# Altium PCB PCB1.PcbDoc
Units mm, origin at the board's own origin, x right, y up, seen from the top; angles counter-clockwise.
Board outline 63 x 73 mm, 2 copper layers (Top Layer, Bottom Layer); 9 components, 23 nets, 80 pads, 5 vias.
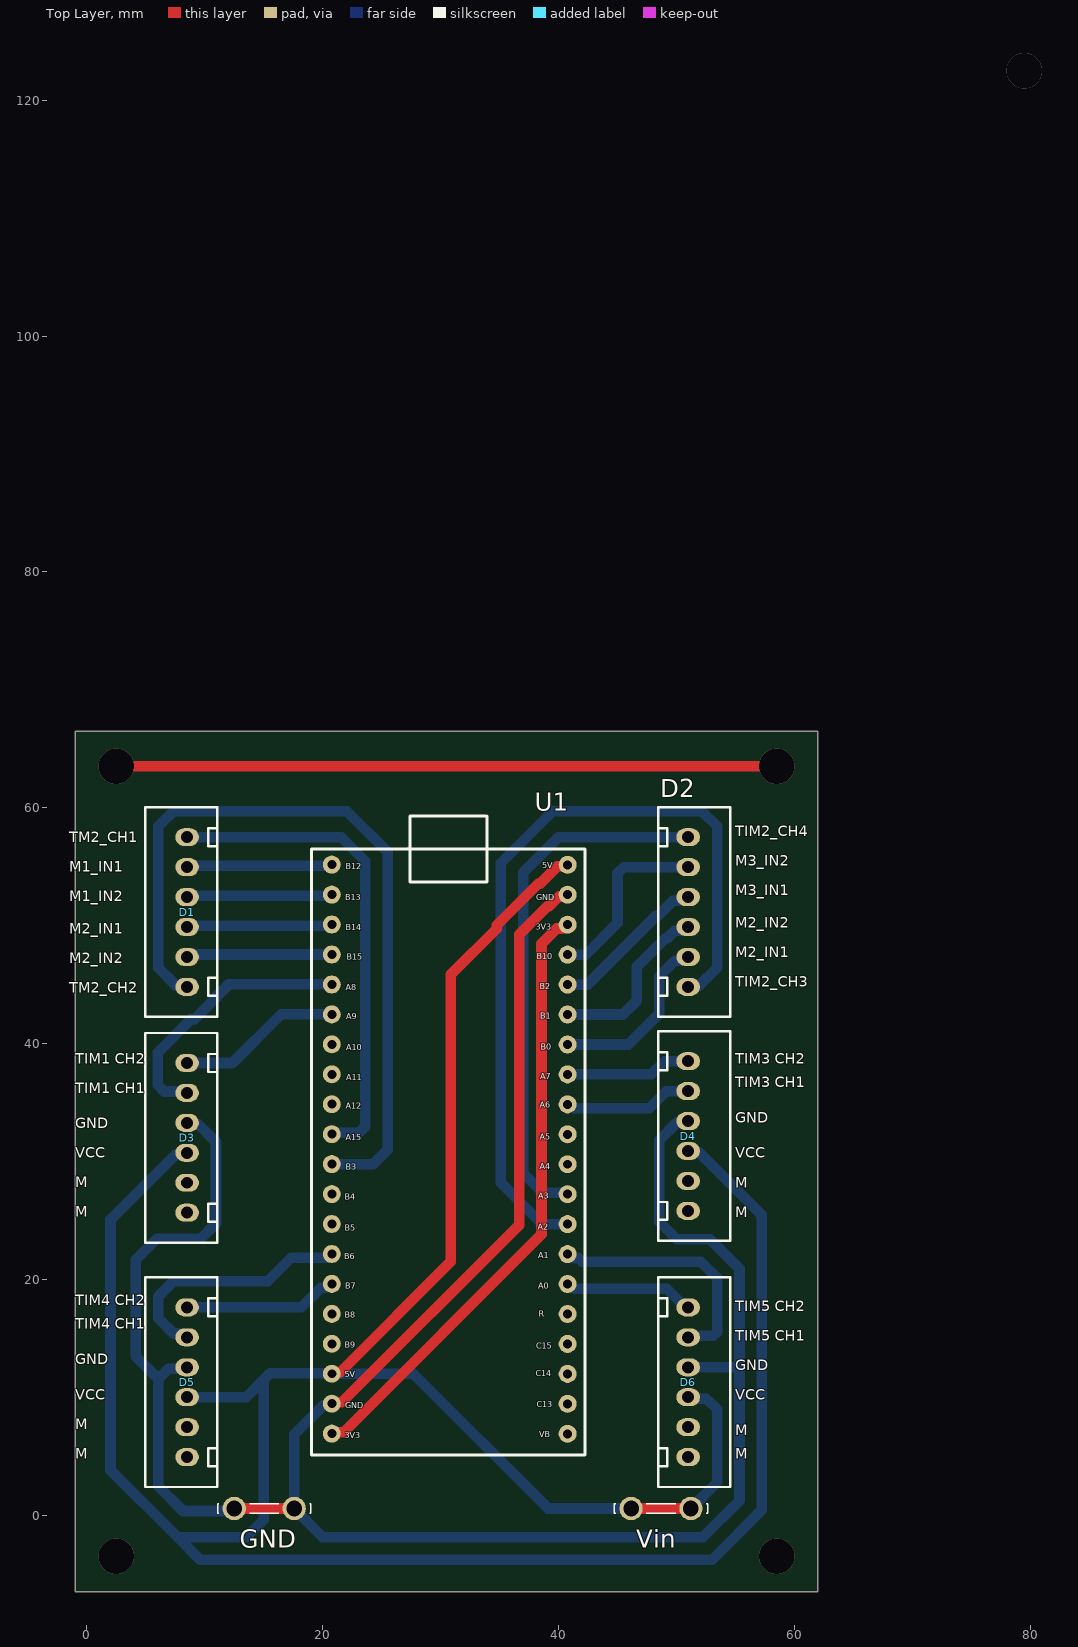
[diagram p0: Top Layer view]
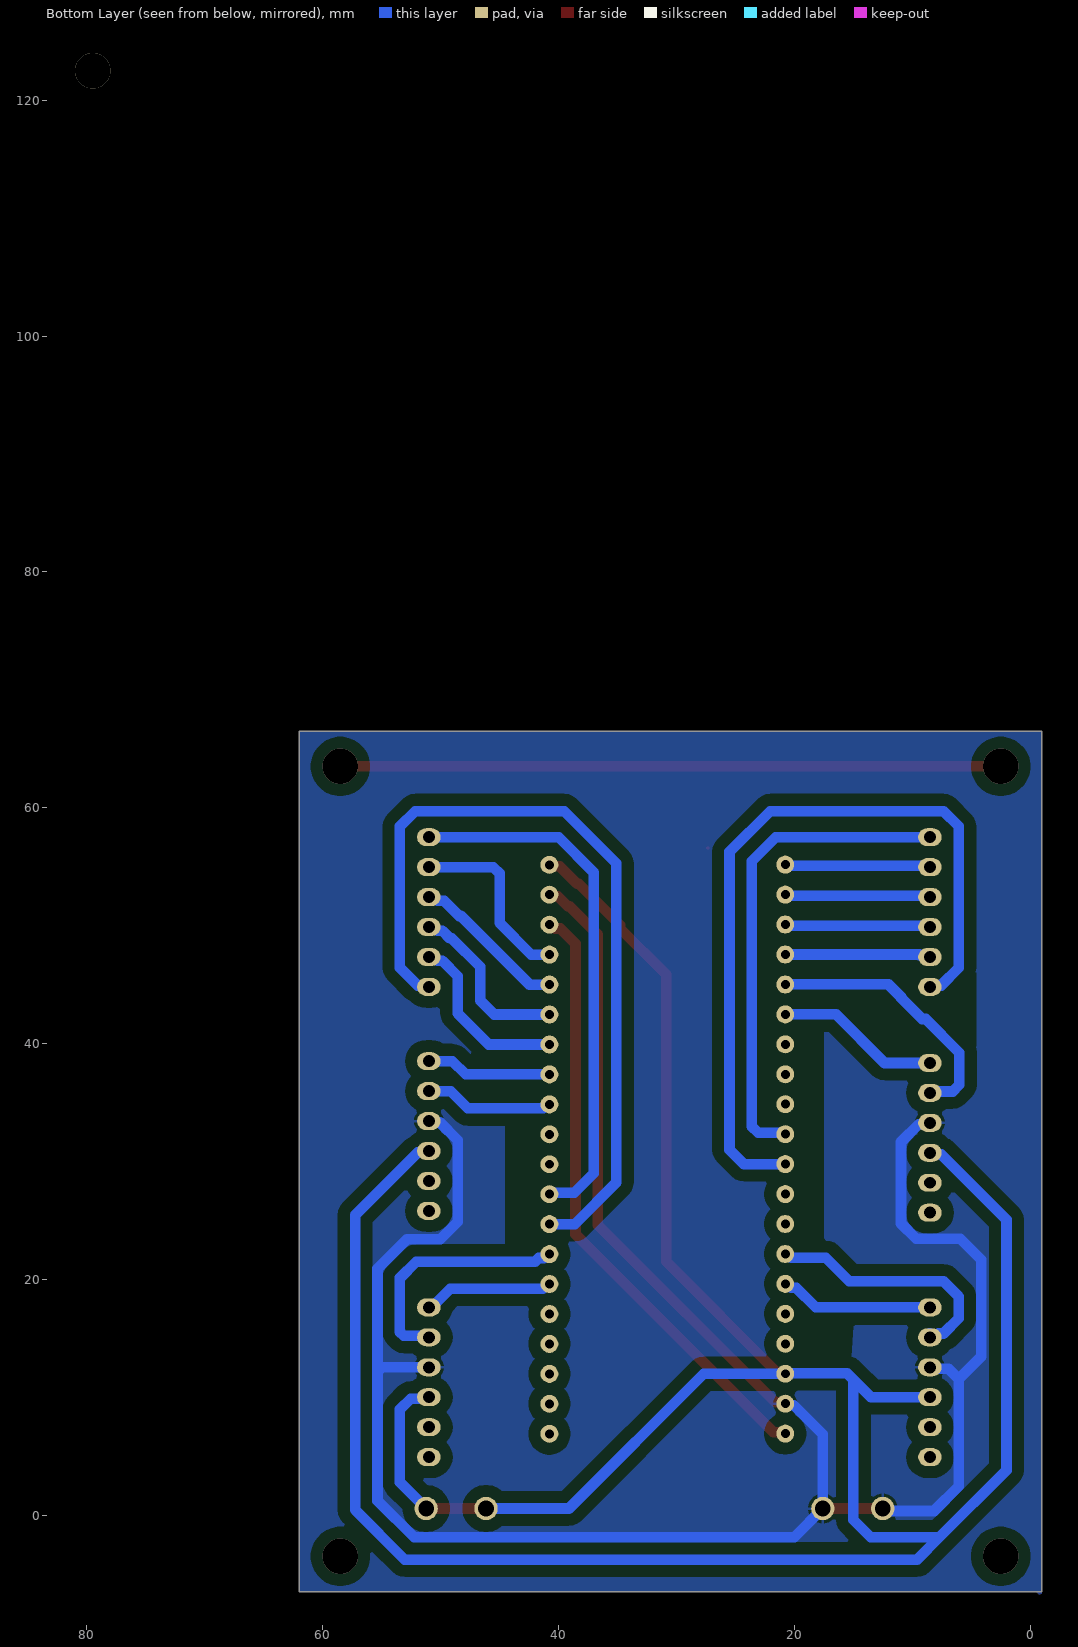
[diagram p1: Bottom Layer view, seen from below]
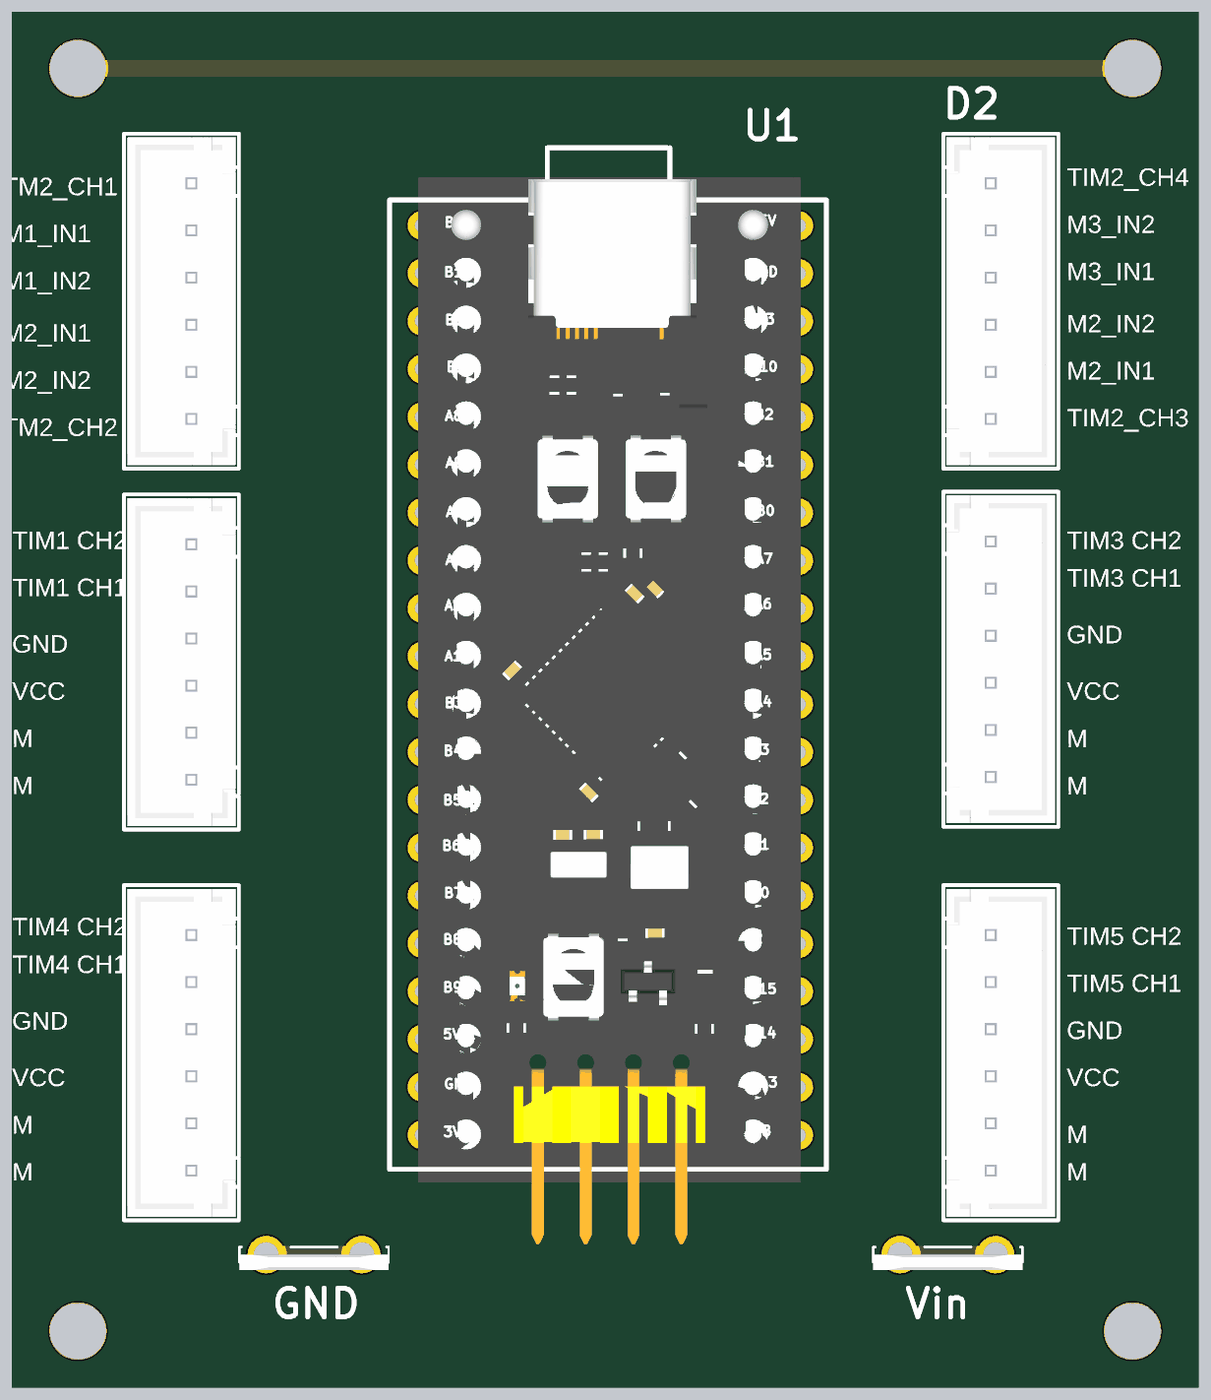
[diagram p2: 3D render of the assembled board from above, using the file's embedded part models]

## Layer stack, top to bottom
Top Solder: solder mask 0.0102, Solder Resist, Dk 3.5
Top Layer: signal copper 0.0356
Dielectric 1: dielectric 0.32, FR-4, Dk 4.8
Bottom Layer: signal copper 0.0356
Bottom Solder: solder mask 0.0102, Solder Resist, Dk 3.5

## Board outline
62.001,-6.5 -1,-6.5 -1,66.5 62.001,66.5

## Design rules (kind name [scope] priority, off if disabled: settings)
AssemblyTestPointUsage [All] p1: isadvanced=TRUE
AssemblyTestpoint [All] p1: isadvanced=TRUE testpointundercomponent=TRUE minsize=1.016 maxsize=2.54 preferedsize=1.524 minholesize=0 maxholesize=1.016 preferedholesize=0.813 testpointgrid=0.025 usegrid=TRUE gridtolerance=0 allowsidetop=TRUE allowsidebottom=TRUE
Clearance [All] p1: gap=1 ignorepadtopadclearanceinfootprint=FALSE ismatrix=TRUE
ComponentClearance [All] p1: isadvanced=TRUE gap=0.254 collisioncheckmode=3 verticalgap=0.254 showdistances=FALSE
FabricationTestPointUsage [All] p1: isadvanced=TRUE valid=0 allowmultiple=FALSE
FabricationTestpoint [All] p1: isadvanced=TRUE side=3 testpointundercomponent=TRUE minsize=1.016 maxsize=2.54 preferedsize=1.524 minholesize=0 maxholesize=1.016 preferedholesize=0.813 testpointgrid=0.025 allowsidetop=TRUE allowsidebottom=TRUE usegrid=TRUE gridtolerance=0
FanoutControl Fanout_BGA [IsBGA] p1: isadvanced=TRUE bgadir=Out bgaviamode=Centered fanoutstyle=Auto fanoutdirection=Alternating viagrid=0.025 // Fanout_BGA (Default Rule)
FanoutControl Fanout_LCC [IsLCC] p2: isadvanced=TRUE bgadir=Out bgaviamode=Centered fanoutstyle=Auto fanoutdirection=Alternating viagrid=0.025 // Fanout_LCC (Default Rule)
FanoutControl Fanout_SOIC [IsSOIC] p3: isadvanced=TRUE bgadir=Out bgaviamode=Centered fanoutstyle=Auto fanoutdirection=Alternating viagrid=0.025 // Fanout_SOIC (Default Rule)
FanoutControl Fanout_Small [(CompPinCount < 5)] p4: isadvanced=TRUE bgadir=Out bgaviamode=Centered fanoutstyle=Auto fanoutdirection=OutThenIn viagrid=0.025 // Fanout_Small (Default Rule)
FanoutControl Fanout_Default [All] p5: isadvanced=TRUE bgadir=Out bgaviamode=Centered fanoutstyle=Auto fanoutdirection=Alternating viagrid=0.025 // Fanout_Default (Default Rule)
Height [All] p1: isadvanced=TRUE minheight=0 maxheight=25.4 prefheight=12.7
HoleSize [All] p1: isadvanced=TRUE absolutevalues=TRUE maxlimit=2.54 minlimit=0.025 maxpercent=80.000 minpercent=20.000
HoleToHoleClearance [All] p1: isadvanced=TRUE gap=0.254 allowstackedmicrovias=TRUE
LayerPairs [All] p1: isadvanced=TRUE enforce=TRUE
MinimumSolderMaskSliver [All] p1: isadvanced=TRUE minsoldermaskwidth=0.254
NetAntennae [All] p1: isadvanced=TRUE netantennaetolerance=0
PasteMaskExpansion [All] p1: isadvanced=TRUE expansion=0
PlaneClearance [All] p1: isadvanced=TRUE clearance=0.508
PlaneConnect [All] p1: isadvanced=TRUE planeconnectstyle=Relief reliefexpansion=0.508 reliefentries=4 reliefconductorwidth=0.254 reliefairgap=0.254
PolygonConnect [All] p1: connectstyle=Relief reliefconductorwidth=0.254 reliefentries=4 polygonreliefangle="90 Angle" airgapwidth=0.254
RoutingCorners [All] p1: isadvanced=TRUE cornerstyle=45-Degree minsetback=2.54 maxsetback=2.54
RoutingPriority [All] p1: isadvanced=TRUE routingpriority=0
RoutingVias [All] p1: holewidth=0.711 width=1.27 viastyle="Through Hole" minholewidth=0.711 minwidth=1.27 maxholewidth=0.711 maxwidth=1.27
ShortCircuit [All] p1: isadvanced=TRUE allowed=FALSE
SilkToSilkClearance [All] p1: isadvanced=TRUE silktosilkclearance=0.254
SilkToSolderMaskClearance [IsPad] p1: isadvanced=TRUE minsilkscreentomaskgap=0.254 clearancetoexposedcopper=TRUE
SolderMaskExpansion [All] p1: isadvanced=TRUE expansion=0.102 istentingtop=FALSE
SupplyNets "Schematic Supply Nets_2" [InNet('+5')] p1: isadvanced=TRUE voltage=0.000
SupplyNets "Schematic Supply Nets_1" [InNet('+3V3')] p2: isadvanced=TRUE voltage=0.000
SupplyNets "Schematic Supply Nets" [InNet('GND')] p3: isadvanced=TRUE voltage=0.000
UnRoutedNet [All] p1: isadvanced=TRUE
UnpouredPolygon [All] p1: isadvanced=TRUE
Width MaxMinWidth_1 [All] p1: isadvanced=TRUE maxlimit=1.2 minlimit=0.254 preferedwidth=0.9 minimp=50.000000 maximp=50.000000 favimp=50.000000
Width [All] p2: maxlimit=0.254 minlimit=0.254 preferedwidth=0.254
4 further rules are at their usual default settings.

## Components (designator, comment, footprint, x,y, rotation, side; value= is the part's Value field where it differs from the comment)
D1 "L298 Driver 1" DATA_PIN_HEADER_6_2.54m 8.5,51.15 r90 top
D2 "L298 Driver 2" DATA_PIN_HEADER_6_2.54m 51,51.15 r270 top
D3 "Encoder 1" DATA_PIN_HEADER_6_2.54m 8.5,32 r90 top
D4 "Encoder 2" DATA_PIN_HEADER_6_2.54m 51,32.15 r270 top
D5 "Encoder 3" DATA_PIN_HEADER_6_2.54m 8.5,11.27 r90 top
D6 "Encoder 4" DATA_PIN_HEADER_6_2.54m 51,11.27 r270 top
GND "terminal block 2" KEYSTONE_1287 15.037,0.559 r0 top
U1 "STM32 BlackPill" "STM 32 Black Pill" 20.776,55.154 r0 top
Vin "terminal block 1" KEYSTONE_1287 48.692,0.559 r0 top

## Footprints (in the part's own frame and the unit in brackets; to place one, negate y for a bottom-side part, rotate by r counter-clockwise, add the part's x,y. Pads: shape width x height; smd on the part's side, far side on the other; paste and mask are expansions set on the pad)
DATA_PIN_HEADER_6_2.54m [mil]
  oval 60x78.74 hole 40: 1(-250,0) 2(-150,0) 3(-50,0) 4(50,0) 5(150,0) 6(250,0)
  silkscreen extent -350,-100 350,140, body extent -343,-94 343,133, height 276
KEYSTONE_1287 [mm]
  round 1.98 hole 1.32: 1_1(-2.54,0) 1_2(2.54,0)
  silkscreen extent -3.96,-0.41 3.96,0.41, body extent -3.96,-0.81 3.96,0, height 14.02
"STM 32 Black Pill" [mil]
  round 60 hole 30: 1(787.4,0) 2(787.2,-99.8) 3(787.2,-199.8) 4(787.2,-299.8) 5(787.2,-399.8) 6(787.2,-499.8) 7(787.2,-599.8) 8(787.2,-699.8) 9(787.2,-799.8) 10(787.2,-899.8) 11(787.2,-999.8) 12(787.2,-1099.8) 13(787.2,-1199.8) 14(787.2,-1299.8) 15(787.2,-1399.8) 16(787.2,-1499.8) 17(787.2,-1599.8) 18(787.2,-1699.8) 19(787.2,-1799.8) 20(787.2,-1899.8) 21(-0.28,0.62) 22(-0.28,-99.38) 23(-0.28,-199.38) 24(-0.28,-299.38) 25(-0.28,-399.38) 26(-0.28,-499.38) 27(-0.28,-599.38) 28(-0.28,-699.38) 29(-0.28,-799.38) 30(-0.28,-899.38) 31(-0.28,-999.38) 32(-0.28,-1099.38) 33(-0.28,-1199.38) 34(-0.28,-1299.38) 35(-0.28,-1399.38) 36(-0.28,-1499.38) 37(-0.28,-1599.38) 38(-0.28,-1699.38) 39(-0.28,-1799.38) 40(-0.28,-1899.38)
  Top Layer lines w10: 255.44,55.62 261.44,55.62
  silkscreen extent -68,-1971 845,163, body extent -8,-2128 792,102, height 124

## Part data
D1 D2 D3 D4 D5 D6: library part DATA_PIN_HEADER_6_2.54m
GND Vin: library part 1287, "Male .250 Quick Fit Terminal", Package=None, Check_prices=https://www.snapeda.com/parts/1287/Keystone/view-part/?ref=eda, MF="Keystone Electronics Corp.", MP=1287, SnapEDA_Link=https://www.snapeda.com/parts/1287/Keystone/view-part/?ref=snap
U1: "STM32F401CC"

## Via types
v1: diameter 3, hole 3, Top Layer to Bottom Layer, 5 vias

## Nets (pads, with @x,y where several pads share a name; then routed paths per layer and width w, separated by ;. In a path a pad name is that pad's centre, name@x,y a point inside that pad or via, vN(x,y) a via of type N, cw(c..) or ccw(c..) an arc to the next point about the centre after c; other vN are vias at no path point)
+3V3: U1.3 U1.40 | length 52.3
  Top Layer w0.9: U1.40 20.888,7.029 21.77,7.029 38.559,23.818 38.559,48.455 39.855,49.751 40.274,49.751 40.602,50.079 U1.3
+5: D3.3 D4.4 D5.3 D6.4 U1.1 U1.38 Vin.1_1 Vin.1_2 | length 256.4
  Top Layer w0.9: U1.38 20.888,12.109 21.476,12.109 30.872,21.504 30.872,45.848 34.759,49.735 34.759,50.029 38.281,53.551 38.428,53.551 39.911,55.035 40.657,55.035 U1.1 ; Vin.1_1 Vin.1_2
  Bottom Layer w0.9: D5.3 13.5,10 15,11.5 ; D3.3 8.381,30.611 7.554,30.611 2,25.056 2,3.813 7.694,-1.881 ; Vin.1_1 39.114,0.559 27.683,11.99 U1.38 20.724,12.035 15.535,12.035 15,11.5 ; D6.4 51.119,9.881 52.542,9.881 53.45,8.973 53.45,2.777 Vin.1_2 ; D4.4 51.119,30.761 51.946,30.761 57.25,25.456 57.25,0.439 53.029,-3.781 9.594,-3.781 7.694,-1.881 ; 7.694,-1.881 13.507,-1.881 15,-0.389 15,11.5
ENA_TIM2_CH2_M1: D1.1 U1.31 | length 67
  Bottom Layer w0.9: D1.1 8.381,44.919 7.554,44.919 6.05,46.424 6.05,58.416 7.346,59.712 22.042,59.712 25.5,56.254 25.5,31 24.27,29.77 U1.31
ENB_TIM2_CH1_M0: D1.6 U1.30 | length 41.6
  Bottom Layer w0.9: D1.6 21.567,57.5 23.6,55.467 23.6,32.956 23.073,32.429 20.888,32.429 U1.30
ENB_TIM2_CH3_M2: D2.6 U1.13 | length 70
  Bottom Layer w0.9: U1.13 38.634,24.679 35.1,28.213 35.1,55.293 39.519,59.712 52.154,59.712 53.45,58.416 53.45,46.424 51.946,44.919 51.119,44.919 D2.6
ENB_TIM2_CH4_M3: D2.1 U1.12 | length 45.3
  Bottom Layer w0.9: U1.12 40.652,27.338 38.662,27.338 37,29 37,54.506 39.994,57.5 D2.1
GND: D3.4 D4.3 D5.4 D6.3 GND.1_1 GND.1_2 U1.2 U1.39 | length 199.1
  Top Layer w0.9: GND.1_1 GND.1_2 ; U1.39 20.888,9.569 21.623,9.569 36.659,24.605 36.659,49.242 39.068,51.651 39.215,51.651 40.063,52.5 40.652,52.5 U1.2
  Bottom Layer w0.9: D5.4 8.381,12.421 6.921,12.421 6.05,11.55 ; D3.4 8.619,33.151 9.446,33.151 10.95,31.646 10.95,24.734 9.654,23.438 5.938,23.438 4.15,21.65 4.15,13.45 6.05,11.55 ; GND.1_1 12.29,0.352 8.148,0.352 6.05,2.45 6.05,11.55 ; U1.39 20.649,9.33 20.061,9.33 17.577,6.846 GND.1_2 20.017,-1.881 52.242,-1.881 55.35,1.226 55.35,12.15 ; D6.3 54.96,12.54 55.35,12.15 ; D4.3 50.881,33.301 50.054,33.301 48.55,31.796 48.55,24.884 50.035,23.399 52.854,23.399 55.35,20.903 55.35,12.15
IN1_M0: D1.5 U1.21 | length 12.4
  Bottom Layer w0.9: D1.5 8.605,55.065 20.664,55.065 U1.21
IN1_M2: D2.5 U1.7 | length 15.2
  Bottom Layer w0.9: U1.7 45.919,39.919 48.55,42.55 48.55,45.716 49.846,47.012 50.265,47.012 50.593,47.34 D2.5
IN2_M0: D1.4 U1.22 | length 12.4
  Bottom Layer w0.9: D1.4 8.605,52.525 20.664,52.525 U1.22
IN2_M2: D2.4 U1.6 | length 15
  Bottom Layer w0.9: U1.6 45.459,42.459 46.65,43.65 46.65,46.503 49.059,48.912 49.206,48.912 49.846,49.552 49.993,49.552 50.265,49.552 50.593,49.88 D2.4
IN3_M1: D1.3 U1.23 | length 12.4
  Bottom Layer w0.9: D1.3 8.605,49.985 20.664,49.985 U1.23
IN3_M3: D2.3 U1.5 | length 13.3
  Bottom Layer w0.9: U1.5 42.459,44.999 48.272,50.812 48.419,50.812 49.699,52.092 50.265,52.092 50.593,52.42 D2.3
IN4_M1: D1.2 U1.24 | length 12.4
  Bottom Layer w0.9: D1.2 8.619,47.459 9.299,47.459 9.389,47.55 U1.24
IN4_M3: D2.2 U1.4 | length 15.8
  Bottom Layer w0.9: U1.4 42.312,47.539 45,50.227 45,54.433 45.527,54.96 D2.2
TIM1_CH1: D3.5 U1.25 | length 22.7
  Bottom Layer w0.9: D3.5 8.381,35.929 6.571,35.929 6,36.5 6,39.216 8.862,42.078 9.145,42.078 10.95,43.884 10.95,43.95 12.01,45.01 U1.25
TIM1_CH2: D3.6 U1.26 | length 14
  Bottom Layer w0.9: D3.6 12.35,38.35 16.47,42.47 U1.26
TIM3_CH1: D4.2 U1.9 | length 11
  Bottom Layer w0.9: U1.9 40.94,34.839 41.279,34.5 47.687,34.5 49.147,35.96 D4.2
TIM3_CH2: D4.1 U1.8 | length 10.7
  Bottom Layer w0.9: U1.8 47.879,37.379 49,38.5 D4.1
TIM4_CH1: D5.5 U1.34 | length 21.5
  Bottom Layer w0.9: D5.5 D5.5@8.5,15.408 ; D5.5@8.5,15.368 8.331,15.199 7.974,15.199 7.765,15.408 7.346,15.408 6.05,16.704 6.05,18.536 7.346,19.832 15.332,19.832 17.322,21.822 20.272,21.822 20.6,22.15 U1.34
TIM4_CH2: D5.6 U1.35 | length 13.1
  Bottom Layer w0.9: D5.6 18.191,17.62 19.853,19.282 20.272,19.282 20.6,19.61 U1.35
TIM5_CH1: D6.2 U1.14 | length 20.7
  Bottom Layer w0.9: U1.14 40.94,22.139 41.268,21.811 41.687,21.811 41.999,21.499 52.067,21.499 53.45,20.116 53.45,15.527 53.122,15.199 51.119,15.199 D6.2
TIM5_CH2: D6.1 U1.15 | length 11
  Bottom Layer w0.9: U1.15 40.94,19.599 41.339,19.2 49.182,19.2 50.762,17.62 D6.1
pads on no net: D3.1 D3.2 D4.5 D4.6 D5.1 D5.2 D6.5 D6.6 U1.10 U1.11 U1.16 U1.17 U1.18 U1.19 U1.20 U1.27 U1.28 U1.29 U1.32 U1.33 U1.36 U1.37
copper on no net: | length 57
  Top Layer w0.9: v1@2,63.5 v1@59,63.5
  other v1: 2.5,-3.5 58.5,-3.5 2.5,63.5 58.5,63.5 79.5,122.5

## Polygon pours and split planes (outlines as drawn)
GND on Bottom Layer "GND_L02_P000" (solid, remove dead copper, pour order 0): 62,66.5 -1,66.5 -1,-7 -0.5,-6.5 62,-6.5

## Other copper
Bottom Layer:
  pour cut-out: 15.156,13.448 19.023,13.448 19.207,13.632 19.207,16.235 18.972,16 15,16
  pour cut-out: 43,33 44.5,33 44.5,23 44.333,23.167 42.204,23.167 42.204,32.64 42.601,33.037
  pour cut-out: 17.5,41 17.5,23.463 17.564,23.526 19.44,23.526 19.44,40.563 19.22,40.783
  pour cut-out: 7.639,42.923 7.639,43.044 4.637,46.045 4.587,45.995 4.587,39.872
  pour cut-out: 42.5,54.5 38,54.5 38,30 39,29 42,32 42,54

## Silkscreen, mask and mechanical layers (free items; w line width, h text height)
Top Overlay:
  text "TIM2_CH4" at 55,57.271 h1.52
  text "TM2_CH1" at -1.5,56.771 h1.52
  text "M3_IN2" at 55,54.771 h1.52
  text "M1_IN1" at -1.5,54.271 h1.52
  text "M3_IN1" at 55,52.271 h1.52
  text "M1_IN2" at -1.5,51.771 h1.52
  text "M2_IN2" at 55,49.5 h1.52
  text "M2_IN1" at -1.5,49 h1.52
  text "M2_IN1" at 55,47 h1.52
  text "M2_IN2" at -1.5,46.5 h1.52
  text "TIM2_CH3" at 55,44.5 h1.52
  text "TM2_CH2" at -1.5,44 h1.52
  text "TIM1 CH2" at -1,38 h1.52
  text "TIM3 CH2" at 54.999,38 h1.52
  text "TIM3 CH1" at 54.999,36 h1.52
  text "TIM1 CH1" at -1,35.5 h1.52
  text "GND" at 54.999,33 h1.52
  text "GND" at -1,32.5 h1.52
  text "VCC" at -1,30 h1.52
  text "VCC" at 55,30 h1.52
  text "M" at -1,27.5 h1.52
  text "M" at 54.999,27.483 h1.52
  text "M" at -1,25 h1.52
  text "M" at 54.999,24.983 h1.52
  text "TIM4 CH2" at -1.001,17.5 h1.52
  text "TIM5 CH2" at 55,17 h1.52
  text "TIM4 CH1" at -1.001,15.5 h1.52
  text "TIM5 CH1" at 55,14.5 h1.52
  text "GND" at -1.001,12.5 h1.52
  text "GND" at 55,12 h1.52
  text "VCC" at -1,9.5 h1.52
  text "VCC" at 55,9.5 h1.52
  text "M" at -1.001,6.983 h1.52
  text "M" at 55,6.483 h1.52
  text "M" at -1.001,4.483 h1.52
  text "M" at 55,4.483 h1.52

## Text inside footprints (layer, text, board x,y; h text height)
U1: Top Overlay "A2" at 38.243,24.196 h0.51; Top Overlay "B13" at 21.912,52.147 h0.51; Top Overlay "B1" at 38.446,42.103 h0.51; Top Overlay "5V" at 38.626,54.879 h0.51; Top Overlay "A7" at 38.446,36.947 h0.51; Top Overlay "B2" at 38.421,44.593 h0.51; Top Overlay "A0" at 38.269,19.218 h0.51; Top Overlay "B12" at 21.937,54.789 h0.51; Top Overlay "B6" at 21.81,21.718 h0.51; Top Overlay "B10" at 38.142,47.133 h0.51; Top Overlay "GND" at 38.091,52.162 h0.51; Top Overlay "B15" at 22.039,47.118 h0.51; Top Overlay "A5" at 38.396,31.842 h0.51; Top Overlay "B9" at 21.861,14.2 h0.51; Top Overlay "3V3" at 21.886,6.529 h0.51; Top Overlay "B7" at 21.912,19.203 h0.51; Top Overlay "A8" at 21.963,44.527 h0.51; Top Overlay "A3" at 38.269,26.813 h0.51; Top Overlay "C15" at 38.091,14.113 h0.51; Top Overlay "A4" at 38.396,29.353 h0.51; Top Overlay "A9" at 21.988,42.038 h0.51; Top Overlay "C14" at 38.065,11.776 h0.51; Top Overlay "C13" at 38.142,9.16 h0.51; Top Overlay "A15" at 21.937,31.776 h0.51; Top Overlay "VB" at 38.345,6.594 h0.51; Top Overlay "B3" at 21.937,29.287 h0.51; Top Overlay "B4" at 21.886,26.747 h0.51; Top Overlay "A10" at 22.013,39.422 h0.51; Top Overlay "A6" at 38.396,34.534 h0.51; Top Overlay "5V" at 21.861,11.71 h0.51; Top Overlay "B14" at 21.963,49.607 h0.51; Top Overlay "R" at 38.319,16.805 h0.51; Top Overlay "3V3" at 38.065,49.647 h0.51; Top Overlay "B8" at 21.861,16.74 h0.51; Top Overlay "B0" at 38.472,39.487 h0.51; Top Overlay "GND" at 21.912,9.069 h0.51; Top Overlay "A1" at 38.269,21.783 h0.51; Top Overlay "A12" at 21.937,34.469 h0.51; Top Overlay "A11" at 21.988,36.882 h0.51; Top Overlay "B5" at 21.861,24.131 h0.51